# EAGLE board mr_radar_platypus (EAGLE 5.11)
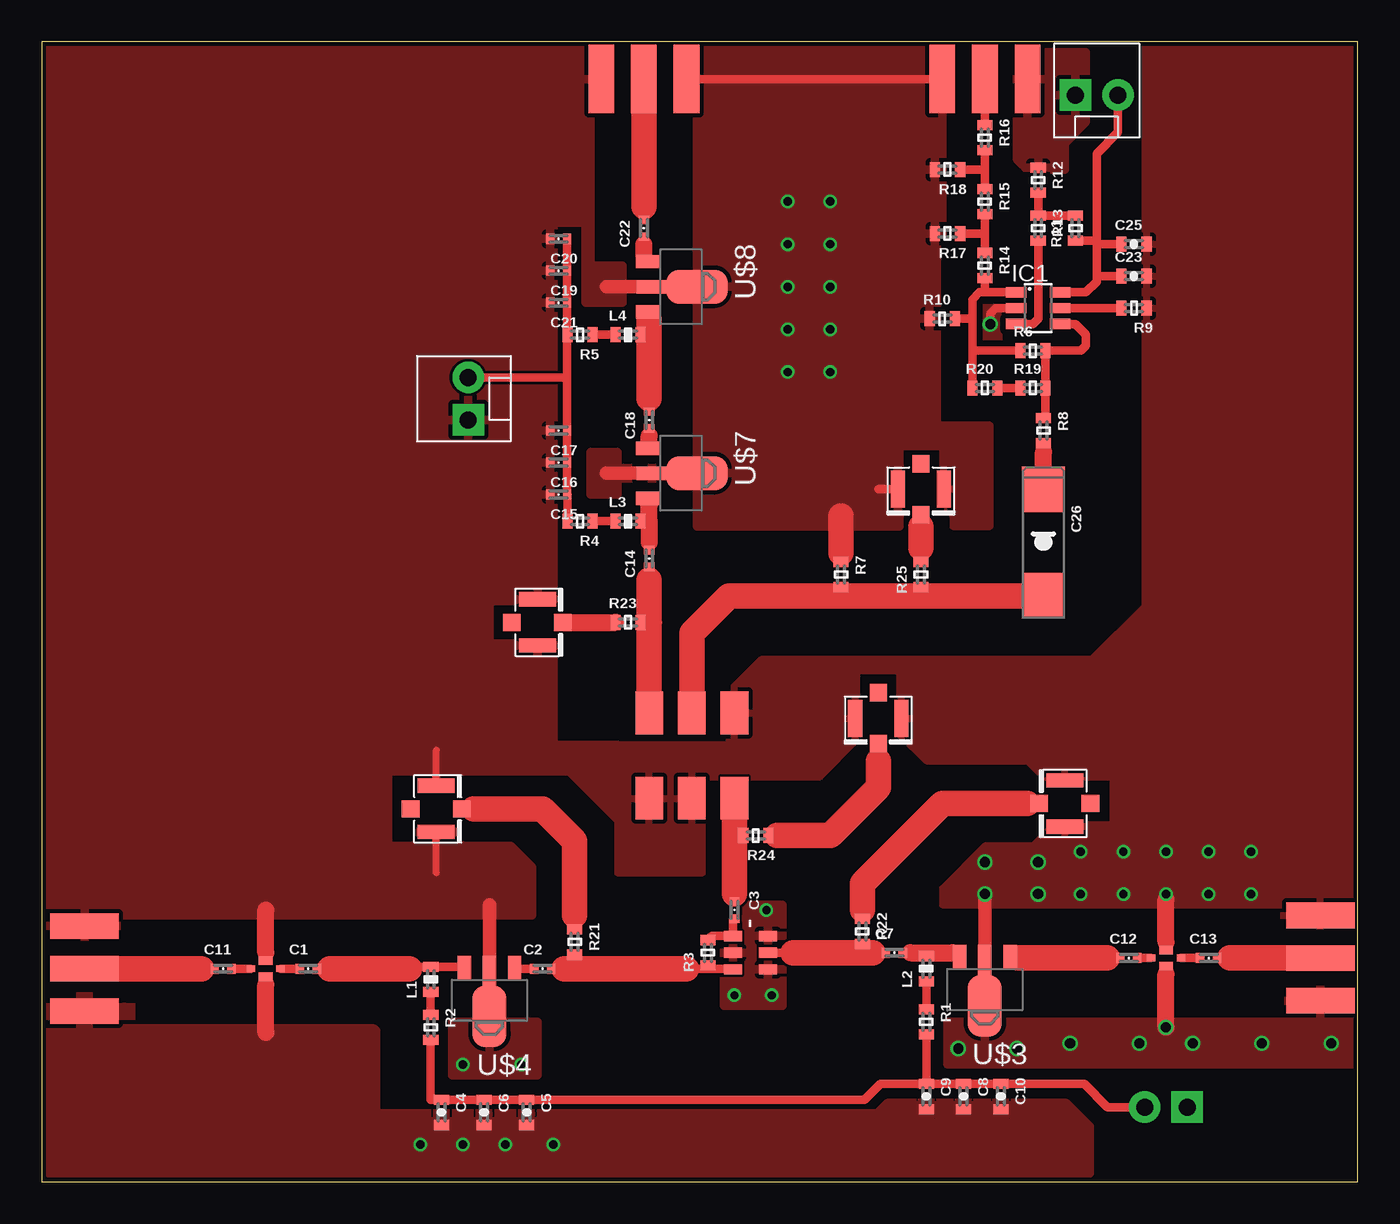
[diagram p0: board, top side]
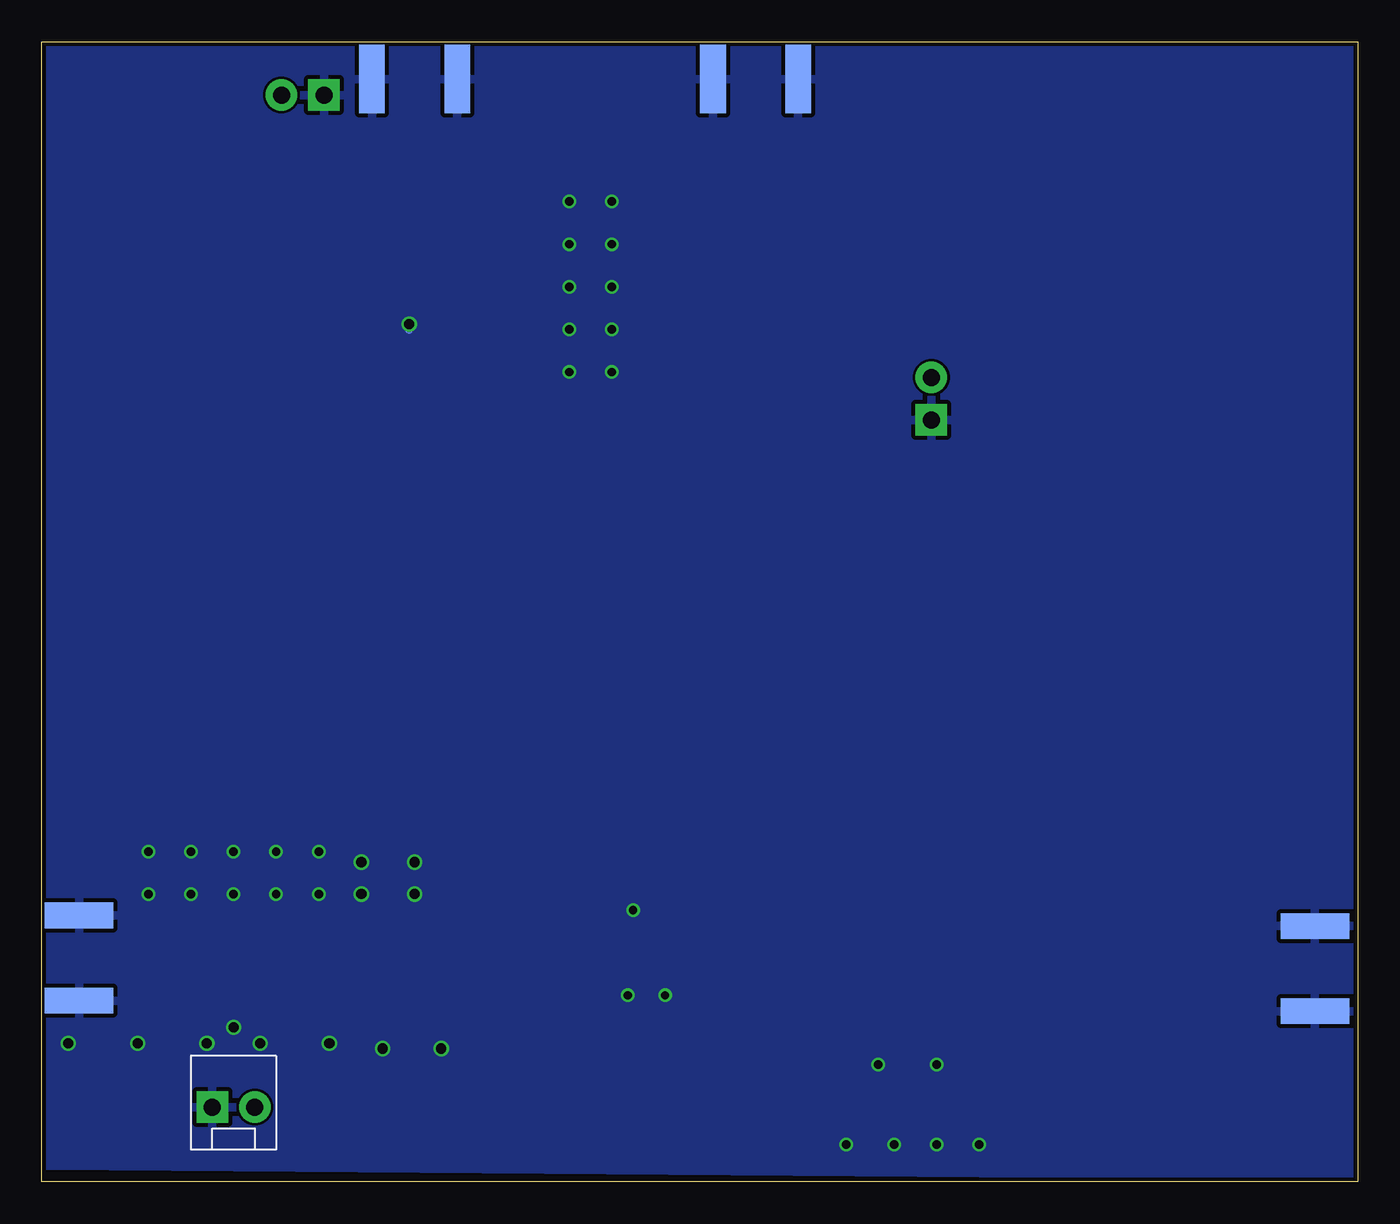
[diagram p1: board, bottom side, seen from below]

Size 78.41 x 67.94 mm. Coordinates in mm from the lower left corner, seen from the top.
Outline: 0,0 78.41,0 78.41,67.94 0,67.94 0,0
Copper layers (1*16): Top 0.035mm / dielectric 1.5mm / Bottom 0.035mm
Design rules "Fusion_eagle_rule_v1.1": minimum track width 6mil, minimum drill 12mil, track to track 6mil, track to pad 6mil, pad to pad 6mil, via to via 6mil, smd to smd 0mil, copper to edge 10mil, drill to drill 10mil, minimum pad ring 10mil, minimum via ring 6mil, stop-mask expansion 2mil, vias tented up to drill 100mil, thermal gap 10mil

## Footprints (pad centres in the part's own frame; a part is rotated, then mirrored left to right if it is on the bottom)
0402-CAP = smd 0.5 x 0.6: P$1 -0.5,0; P$2 0.5,0
0603-CAP = smd 0.6 x 0.9: P$1 -0.75,0; P$2 0.75,0
7343/D = smd 2.7 x 2.55: + -3.175,0; - 3.175,0
TSOT23-6 = smd 0.62 x 1.22: 1 -0.95,-1.3; 2 0,-1.3; 3 0.95,-1.3; 4 0.95,1.3; 5 0,1.3; 6 -0.95,1.3
SMA-EDGE = smd 1.524 x 4.064: GND@0 0,0; GND@1 5.08,0; SIG 2.54,0 | smd 1.524 x 4.064 bottom: GND@2 0,0; GND@3 5.08,0
MOLEX-1X2 = drill 1.016 pad 1.88 square: 1 0,0 | drill 1.016 pad 1.88 round: 2 2.54,0
0603-IND = smd 0.6 x 0.9: P$1 -0.75,0; P$2 0.75,0
0603-RES = smd 0.6 x 0.9: P$1 -0.75,0; P$2 0.75,0
SCN-2-35-1 = smd 0.61 x 1.067: GND@2 0,1.041; GND@3 -0.991,-1.041; GND@6 0.991,-1.041; IN 0,-1.041; OUT1 -0.991,1.041; OUT2 0.991,1.041
CD542 = smd 1.651 x 2.54: GND@1 -2.54,-2.54; GND@4 2.54,2.54; GND@5 0,2.54; IF 0,-2.54; LO -2.54,2.54; RF 2.54,-2.54
SOT89 = smd 0.8 x 1.9: GND 0,-1.727 | smd 2.032 x 3.65: GNDPADDLE 0,0.94 | smd 0.8 x 1.4: RFIN -1.499,-1.981; RFOUT 1.499,-1.981
3600BP14M0600T = smd 0.508 x 0.406: P$1 -0.889,0; P$2 0.889,0 | smd 0.813 x 0.508: P$GND0 0,0.483; P$GND1 0,-0.483
U.FL = smd 2.2 x 0.85: P$1 0,1.375; P$2 0,-1.375 | smd 1.05 x 1: P$3 1.525,0; P$4 -1.525,0

## Placement (x,y rotation side)
C1  [0402-CAP]  15.88,12.7 0 top
C2  [0402-CAP]  29.85,12.7 0 top
C3  [0402-CAP]  41.27,16.19 270 top
C4  [0603-CAP]  23.81,4.13 270 top
C5  [0603-CAP]  28.89,4.13 270 top
C6  [0603-CAP]  26.35,4.13 270 top
C7  [0402-CAP]  50.8,13.65 0 top
C8  [0603-CAP]  54.93,5.08 270 top
C9  [0603-CAP]  52.7,5.08 270 top
C10  [0603-CAP]  57.15,5.08 270 top
C11  [0402-CAP]  10.79,12.7 0 top
C12  [0402-CAP]  64.77,13.33 0 top
C13  [0402-CAP]  69.53,13.33 0 top
C14  [0402-CAP]  36.2,37.15 90 top
C15  [0402-CAP]  30.8,40.96 180 top
C16  [0402-CAP]  30.8,42.86 180 top
C17  [0402-CAP]  30.8,44.77 180 top
C18  [0402-CAP]  36.2,45.4 90 top
C19  [0402-CAP]  30.8,54.29 180 top
C20  [0402-CAP]  30.8,56.2 180 top
C21  [0402-CAP]  30.8,52.39 180 top
C22  [0402-CAP]  35.88,56.83 90 top
C23  10nF  [0603-CAP]  65.09,53.98 0 top
C25  .1uF  [0603-CAP]  65.09,55.88 0 top
C26  [7343/D]  59.69,38.1 270 top
IC1  LT6230CS6  [TSOT23-6]  59.37,52.07 270 top
J$1  SMA_EDGE  [SMA-EDGE]  38.42,65.72 180 top
J$2  SMA_EDGE  [SMA-EDGE]  2.54,15.24 270 top
J$3  SMA_EDGE  [SMA-EDGE]  58.74,65.72 180 top
J$4  SMA_EDGE  [SMA-EDGE]  76.2,10.79 90 top
JP2  [MOLEX-1X2]  68.26,4.45 0 bottom
JP3  [MOLEX-1X2]  25.4,45.4 90 top
JP4  [MOLEX-1X2]  61.59,64.77 0 top
L1  [0603-IND]  23.18,12.06 90 top
L2  [0603-IND]  52.7,12.7 90 top
L3  [0603-IND]  34.92,39.37 0 top
L4  [0603-IND]  34.92,50.48 0 top
R1  [0603-RES]  52.7,9.53 270 top
R2  [0603-RES]  23.18,9.21 270 top
R3  [0603-RES]  39.69,13.65 90 top
R4  [0603-RES]  32.07,39.37 180 top
R5  [0603-RES]  32.07,50.48 180 top
R6  10k  [0603-RES]  59.05,49.53 0 top
R7  51  [0603-RES]  47.62,36.2 270 top
R8  1k  [0603-RES]  59.69,44.77 270 top
R9  JMP  [0603-RES]  65.09,52.07 180 top
R10  500  [0603-RES]  53.66,51.44 0 top
R11  50k  [0603-RES]  61.59,56.83 90 top
R12  50k  [0603-RES]  59.37,59.69 270 top
R13  950  [0603-RES]  59.37,56.83 270 top
R14  JMP  [0603-RES]  56.2,54.61 270 top
R15  JMP  [0603-RES]  56.2,58.42 270 top
R16  JMP  [0603-RES]  56.2,62.23 270 top
R17  JMP  [0603-RES]  53.98,56.52 180 top
R18  JMP  [0603-RES]  53.98,60.33 180 top
R19  DNP  [0603-RES]  59.05,47.31 0 top
R20  DNP  [0603-RES]  56.2,47.31 0 top
R21  [0603-RES]  31.75,14.29 270 top
R22  [0603-RES]  48.89,14.92 270 top
R23  [0603-RES]  34.92,33.34 0 top
R24  [0603-RES]  42.54,20.64 180 top
R25  [0603-RES]  52.39,36.2 90 top
U$1  SCN-2-35-1  [SCN-2-35-1]  42.23,13.65 90 top
U$2  ADE-30W+  [CD542]  38.73,25.4 180 top
U$3  MGA30989  [SOT89]  56.2,11.43 180 top
U$4  MGA30989  [SOT89]  26.67,10.79 180 top
U$5  3600BP14M0600T  [3600BP14M0600T]  66.99,13.33 0 top
U$6  3600BP14M0600T  [3600BP14M0600T]  13.33,12.7 0 top
U$7  MGA30989  [SOT89]  38.1,42.23 270 top
U$8  MGA30989  [SOT89]  38.1,53.34 270 top
U$9  U.FL  [U.FL]  23.5,22.23 0 top
U$10  U.FL  [U.FL]  60.96,22.54 180 top
U$11  U.FL  [U.FL]  29.53,33.34 0 top
U$12  U.FL  [U.FL]  49.85,27.62 270 top
U$13  U.FL  [U.FL]  52.39,41.27 270 top

## Library data of the parts
C1-C23 C25 C26 L1-L4 R1-R25 = pel_dipol_comp
IC1 = linear-technology; MPN: LT6230CS6#TR; OC_FARNELL: 1663845; OC_NEWARK: 57M9332
J$1-J$4 JP2-JP4 U$9-U$13 = SparkFun
U$1-U$8 = mr_radar

## Nets
GND: C4.P$2 C5.P$2 C6.P$2 C8.P$2 C9.P$2 C10.P$2 C15.P$2 C16.P$2 C17.P$2 C19.P$2 C20.P$2 C21.P$2 C23.P$2 C25.P$2 IC1.2 J$1.GND@0 J$1.GND@1 J$1.GND@2 J$1.GND@3 J$2.GND@0 J$2.GND@1 J$2.GND@2 J$2.GND@3 J$3.GND@0 J$3.GND@1 J$3.GND@2 J$3.GND@3 J$4.GND@0 J$4.GND@1 J$4.GND@2 J$4.GND@3 JP2.1 JP3.1 JP4.1 R7.P$1 R9.P$1 R10.P$1 R12.P$1 R17.P$2 R18.P$2 U$1.GND@2 U$1.GND@3 U$1.GND@6 U$2.GND@1 U$2.GND@4 U$2.GND@5 U$3.GND U$3.GNDPADDLE U$4.GND U$4.GNDPADDLE U$5.P$GND0 U$5.P$GND1 U$6.P$GND0 U$6.P$GND1 U$7.GND U$7.GNDPADDLE U$8.GND U$8.GNDPADDLE U$9.P$1 U$9.P$2 U$10.P$1 U$10.P$2 U$11.P$1 U$11.P$2 U$12.P$1 U$12.P$2 U$13.P$1 U$13.P$2
N$1: C1.P$2 L1.P$2 U$4.RFOUT
N$2: C1.P$1 U$6.P$2
N$4: C7.P$2 L2.P$2 U$3.RFOUT
N$5: C7.P$1 R22.P$2 U$1.IN
N$6: C2.P$1 U$4.RFIN
N$7: C2.P$2 R3.P$1 R21.P$2 U$1.OUT1
N$8: C3.P$2 R3.P$2 U$1.OUT2
N$10: C11.P$1 J$2.SIG
N$11: C11.P$2 U$6.P$1
N$12: C12.P$1 U$3.RFIN
N$13: C12.P$2 U$5.P$1
N$14: C13.P$1 U$5.P$2
N$15: C13.P$2 J$4.SIG
N$16: R25.P$2 U$13.P$3
N$17: L2.P$1 R1.P$1
N$18: L1.P$1 R2.P$1
N$19: C14.P$1 R23.P$2 U$2.RF
N$20: C14.P$2 L3.P$2 U$7.RFOUT
N$21: C18.P$2 L4.P$2 U$8.RFOUT
N$22: C26.- R7.P$2 R25.P$1 U$2.IF
N$23: C18.P$1 U$7.RFIN
N$24: R23.P$1 U$11.P$3
N$25: L3.P$1 R4.P$1
N$26: C15.P$1 C16.P$1 C17.P$1 C19.P$1 C20.P$1 C21.P$1 JP3.2 R4.P$2 R5.P$2
N$27: C22.P$1 U$8.RFIN
N$28: C22.P$2 J$1.SIG
N$29: L4.P$1 R5.P$1
N$30: IC1.4 R6.P$2 R8.P$1 R19.P$2
N$31: IC1.1 R6.P$1 R10.P$2 R14.P$2 R20.P$1
N$32: R11.P$2 R12.P$2 R13.P$1
N$33: C26.+ R8.P$2
N$34: R14.P$1 R15.P$2 R17.P$1
N$35: IC1.5 R9.P$2
N$36: R15.P$1 R16.P$2 R18.P$1
N$37: J$3.SIG R16.P$1
N$38: IC1.3 R13.P$2
N$39: R19.P$1 R20.P$2
N$40: R21.P$1 U$9.P$3
N$41: R24.P$1 U$12.P$3
N$42: R22.P$1 U$10.P$3
N$43: C3.P$1 R24.P$2 U$2.LO
TX_VCC: C4.P$1 C5.P$1 C6.P$1 C8.P$1 C9.P$1 C10.P$1 JP2.2 R1.P$2 R2.P$2
VCC: C23.P$1 C25.P$1 IC1.6 JP4.2 R11.P$1

## Tracks (layer width: path | path; a pad name or v marks a point on that pad's centre or on a via)
GND  (via drill 0.5, 0.6)
  Top 0.254: U$6.P$GND0 13.33,13.65
  Top 0.406: 23.5,18.42 U$9.P$2 | U$9.P$1 23.5,25.72
  Top 0.508: IC1.2 56.83,52.07 56.52,51.75 v56.52,51.12 | R7.P$1 47.62,37.47 | U$13.P$2 49.85,41.27 | U$5.P$GND0 66.99,14.29 | 66.99,12.38 U$5.P$GND1 | 13.33,11.75 U$6.P$GND1 | J$1.GND@2 J$3.GND@3
  Top 0.61: 13.33,13.65 13.33,13.33
  Top 0.813: U$4.GND 26.67,16.51 | U$3.GND v56.2,17.14 | 33.66,53.34 U$8.GND | 33.66,42.23 U$7.GND
  Top 1.016: 13.33,13.65 13.33,16.19 | 66.99,14.29 66.99,16.83 | v66.99,9.21 66.99,12.38 | 13.33,8.89 13.33,11.75
  Top 1.524: 47.62,37.47 47.62,39.69
  Bottom 0.508: v56.52,51.12 56.52,50.8
  other vias: 43.18,16.19 43.5,11.11 41.27,11.11 25.08,6.99 28.58,6.99 25.08,2.22 27.62,2.22 22.54,2.22 30.48,2.22 44.45,58.42 44.45,55.88 46.99,58.42 46.99,55.88 46.99,53.34 44.45,53.34 44.45,50.8 46.99,50.8 44.45,48.26 46.99,48.26 61.91,17.14 64.45,17.14 61.91,19.69 64.45,19.69 66.99,19.69 66.99,17.14 69.53,17.14 69.53,19.69 72.07,17.14 72.07,19.69 59.37,17.14 59.37,19.05 56.2,19.05 54.61,7.94 58.1,7.94 61.28,8.25 65.41,8.25 68.58,8.25 72.71,8.25 76.84,8.25
  pour Bottom: 78.11,67.63 78.11,0.95 0.32,0.32 0.32,67.63
  pour Top: 51.12,45.09 53.34,45.09 53.34,55.88 53.66,55.88 53.66,67.63 51.12,67.63
  pour Top (isolate 0.356): 55.88,50.16 57.15,50.16 57.15,52.07 55.88,52.07
  pour Top (isolate 0.356): 58.74,60.33 60.96,60.33 60.96,61.91 62.23,63.18 62.23,67.31 58.1,67.31 58.1,60.96
  pour Top: 39.05,67.63 39.05,39.05 51.12,39.05 51.12,67.63
  pour Top: 34.29,18.42 39.37,18.42 39.37,24.13 46.35,24.13 48.58,26.35 48.58,30.48 51.12,30.48 51.12,26.67 52.7,25.08 58.74,25.08 59.69,24.13 63.82,24.13 63.82,21.27 60.32,21.27 59.05,20 56.2,20 53.66,17.46 53.66,16.51 73.98,16.51 73.98,15.24 78.11,15.24 78.11,67.63 65.72,67.63 65.72,34.29 62.55,31.12 42.86,31.12 40.96,29.21 40.96,26.04 34.29,26.04
  pour Top: 0.32,14.6 4.45,14.6 4.45,15.88 29.21,15.88 29.21,18.73 27.94,20 25.08,20 24.77,20.32 24.77,20.96 22.54,20.96 22.54,20.32 22.23,20 21.27,20 0.32,20
  pour Top: 0.32,20 20.64,20 20.64,24.45 22.23,24.45 22.54,24.13 24.45,24.13 24.77,24.45 31.43,24.45 34.29,21.59 34.29,26.04 30.48,26.04 30.48,32.07 26.67,32.07 26.67,34.61 30.48,34.61 30.48,67.63 0.32,67.63
  pour Top: 30.16,57.15 32.38,57.15 32.7,57.15 32.7,67.63 30.48,67.63
  pour Top: 53.66,42.55 54.29,42.23 53.98,42.23 53.98,40.01 54.29,39.69 54.29,39.05 56.52,39.05 56.52,45.09 50.8,45.09 50.48,45.4 50.48,43.81 53.66,43.81
  pour Top: 32.38,57.15 32.38,52.39 34.61,52.39 34.61,54.61 32.7,54.61 32.7,57.15
  pour Top: 39.05,44.13 39.05,42.55 34.29,42.55 34.29,43.5 32.7,43.5 32.7,40.96 34.29,40.96 34.29,41.91 40.32,41.91 40.32,44.13
  pour Top: 39.05,16.51 44.13,16.51 44.13,10.48 40.64,10.48 40.64,15.24 38.73,15.24 38.73,18.42 39.05,18.42
  pour Top: 29.53,9.53 24.45,9.53 24.45,6.35 29.53,6.35
  pour Top: 58.74,9.53 58.74,6.99 53.98,6.99 53.98,9.53
  pour Top: 58.74,6.99 58.74,9.53 73.98,9.53 74.3,9.84 74.3,11.43 78.11,11.43 78.11,6.99 67.63,6.99
  pour Top: 5.08,8.89 5.08,10.79 0.64,10.79 0.64,0.64 62.23,0.64 62.23,3.17 60.96,4.45 50.48,4.45 49.85,3.81 19.69,3.81 19.69,8.89
N$1
  Top 0.508: U$4.RFOUT 25.13,12.81 L1.P$2 22.02,12.81 arc90 21.91,12.7 | C1.P$2 17.15,12.7
  Top 1.524: 17.15,12.7 21.91,12.7
N$2
  Top 0.508: U$6.P$2 C1.P$1
N$4
  Top 0.508: 54.66,13.45 U$3.RFOUT 54.46,13.65 54.29,13.65 | C7.P$2 51.75,13.65 52.5,13.65 L2.P$2
  Top 1.016: 51.75,13.65 54.29,13.65
N$5
  Top 0.508: 49.53,13.65 C7.P$1 | U$1.IN 44.77,13.65 | 48.89,13.65 R22.P$2
  Top 1.524: 44.77,13.65 48.89,13.65 49.53,13.65
N$6
  Top 0.508: U$4.RFIN 28.25,12.7 C2.P$1
N$7
  Top 0.508: U$1.OUT1 arc90 41.15,12.7 39.48,12.7 | C2.P$2 31.12,12.7 | 31.75,12.7 R21.P$2 | 39.48,12.7 R3.P$1 | 38.42,12.7 39.48,12.7
  Top 1.524: 31.12,12.7 31.75,12.7 38.42,12.7
N$8
  Top 0.508: C3.P$2 41.19,15.6 U$1.OUT2 39.93,14.64 R3.P$2
N$10
  Top 0.508: 9.53,12.7 C11.P$1
  Top 1.524: J$2.SIG 9.53,12.7
N$11
  Top 0.508: U$6.P$1 C11.P$2
N$12
  Top 0.508: U$3.RFIN 57.77,13.33 58.1,13.33 | 63.5,13.33 C12.P$1
  Top 1.524: 58.1,13.33 63.5,13.33
N$13
  Top 0.508: U$5.P$1 C12.P$2
N$14
  Top 0.508: C13.P$1 U$5.P$2
N$15
  Top 0.508: C13.P$2 70.8,13.33
  Top 1.524: 70.8,13.33 J$4.SIG
N$16
  Top 0.508: R25.P$2 52.39,37.78 | 52.39,39.05 U$13.P$3
  Top 1.524: 52.39,37.78 52.39,39.05
N$17
  Top 0.508: L2.P$1 R1.P$1
N$18
  Top 0.508: L1.P$1 R2.P$1
N$19
  Top 0.508: 36.2,35.88 C14.P$1 | R23.P$2 36.2,33.34 36.71,33.34
  Top 1.524: 36.2,35.88 36.2,33.34 U$2.RF
N$20
  Top 0.508: 36.2,38.1 C14.P$2 | 36.2,40.32 36.2,40.73 U$7.RFOUT | L3.P$2 36.2,39.37
  Top 1.016: 36.2,38.1 36.2,39.37 36.2,40.32
N$21
  Top 0.508: U$8.RFOUT 36.2,51.84 36.2,51.44 | C18.P$2 36.2,46.67 | 36.2,50.48 L4.P$2
  Top 1.524: 36.2,46.67 36.2,50.48 36.2,51.44
N$22
  Top 0.508: R7.P$2 47.94,35.45 47.94,34.93 | 52.39,34.93 R25.P$1
  Top 1.524: C26.- 52.39,34.93 47.94,34.93 40.96,34.93 38.73,32.7 U$2.IF
N$23
  Top 0.508: U$7.RFIN arc-90 36.2,43.97 | 36.2,44.45 C18.P$1
  Top 1.016: 36.2,43.97 36.2,44.45
N$24
  Top 1.016: U$11.P$3 R23.P$1
N$25
  Top 0.508: R4.P$1 L3.P$1
N$26
  Top 0.508: R4.P$2 31.32,40.96 C15.P$1 C16.P$1 C17.P$1 31.3,47.94 | 31.3,47.94 31.3,50.48 R5.P$2 31.3,50.5 C21.P$1 C19.P$1 C20.P$1 | 31.3,47.94 JP3.2
N$27
  Top 0.508: U$8.RFIN 35.88,54.84 35.88,55.25 | 35.88,55.88 C22.P$1
  Top 1.016: 35.88,55.25 35.88,55.88
N$28
  Top 0.508: C22.P$2 35.88,58.1
  Top 1.524: 35.88,58.1 J$1.SIG
N$29
  Top 0.508: R5.P$1 L4.P$1
N$30
  Top 0.508: IC1.4 61.59,51.12 62.23,50.48 62.23,49.85 61.91,49.53 R6.P$2 R19.P$2 59.8,45.52 R8.P$1
N$31
  Top 0.508: R20.P$1 55.45,49.53 | 55.45,49.53 55.45,51.44 | 55.45,51.44 R10.P$2 | 55.45,49.53 R6.P$1 | 56.2,53.02 55.88,53.02 55.45,52.59 55.45,51.44 | 56.2,53.02 IC1.1 | 56.2,53.02 R14.P$2
N$32
  Top 0.508: R12.P$2 R13.P$1 R11.P$2
N$33
  Top 0.508: 59.69,43.5 R8.P$2
  Top 1.016: C26.+ 59.69,43.5
N$34
  Top 0.508: 56.2,56.52 R14.P$1 | 56.2,56.52 R15.P$2 | R17.P$1 56.2,56.52
N$35
  Top 0.508: IC1.5 R9.P$2
N$36
  Top 0.508: R15.P$1 56.2,60.33 | 56.2,60.33 R16.P$2 | 56.2,60.33 R18.P$1
N$37
  Top 0.508: R16.P$1 J$3.SIG
N$38
  Top 0.508: IC1.3 59.05,51.12 59.37,51.44 R13.P$2
N$39
  Top 0.508: R20.P$2 R19.P$1
N$40
  Top 0.406: R21.P$1 31.75,15.88
  Top 0.508: 25.72,22.23 U$9.P$3
  Top 1.524: 31.75,15.88 31.75,20.32 29.85,22.23 25.72,22.23
N$41
  Top 0.508: R24.P$1 43.81,20.64 | 49.85,25.08 U$12.P$3
  Top 1.524: 43.81,20.64 46.99,20.64 49.85,23.5 49.85,25.08
N$42
  Top 0.508: R22.P$1 48.89,16.19 | 58.74,22.54 U$10.P$3
  Top 1.524: 48.89,16.19 48.89,17.78 53.66,22.54 58.74,22.54
N$43
  Top 0.508: C3.P$1 41.27,17.14 | 41.27,20.64 R24.P$2
  Top 1.524: 41.27,17.14 41.27,20.64 U$2.LO
TX_VCC
  Top 0.508: R2.P$2 23.18,4.88 C4.P$1 C6.P$1 C5.P$1 49.01,4.88 49.96,5.83 C9.P$1 | C9.P$1 C8.P$1 C10.P$1 62.11,5.83 63.5,4.45 JP2.2 | C9.P$1 R1.P$2
VCC
  Top 0.508: IC1.6 61.91,53.02 arc-90 61.91,53.02 62.23,53.02 62.86,53.66 62.86,53.98 | R11.P$1 62.75,56.08 arc-90 62.86,55.97 | 62.86,55.88 C25.P$1 | 62.86,53.98 62.86,55.88 | 62.86,53.98 C23.P$1 | 62.86,55.97 62.86,61.28 64.14,62.55 JP4.2 | 62.86,55.88 62.86,55.97